# EAGLE board test_instrumentation_amplifier (EAGLE 9.0.1)
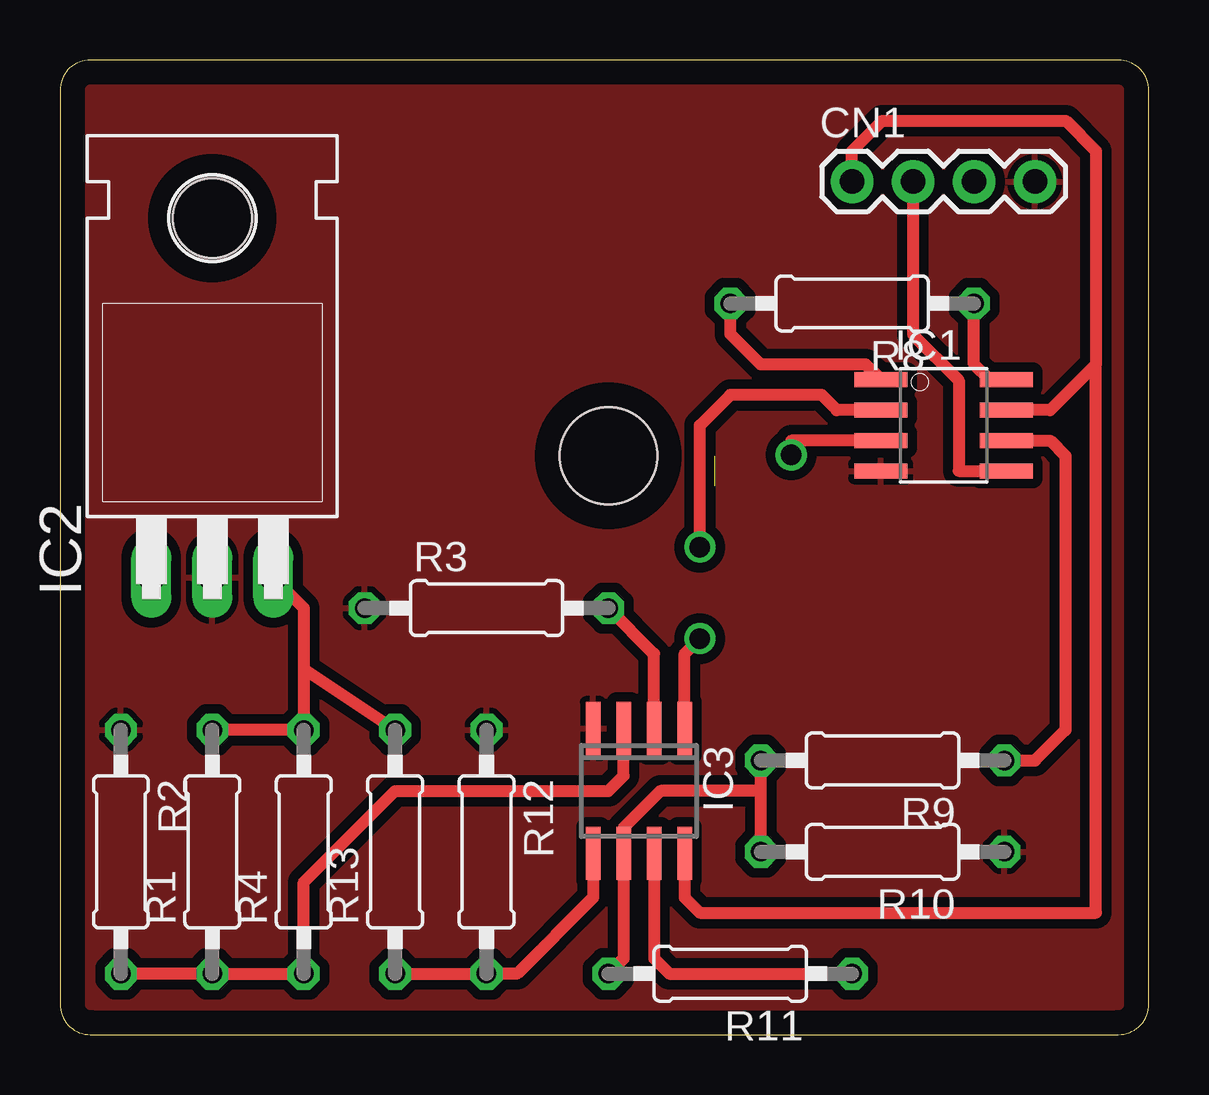
[diagram p0: board, top side]
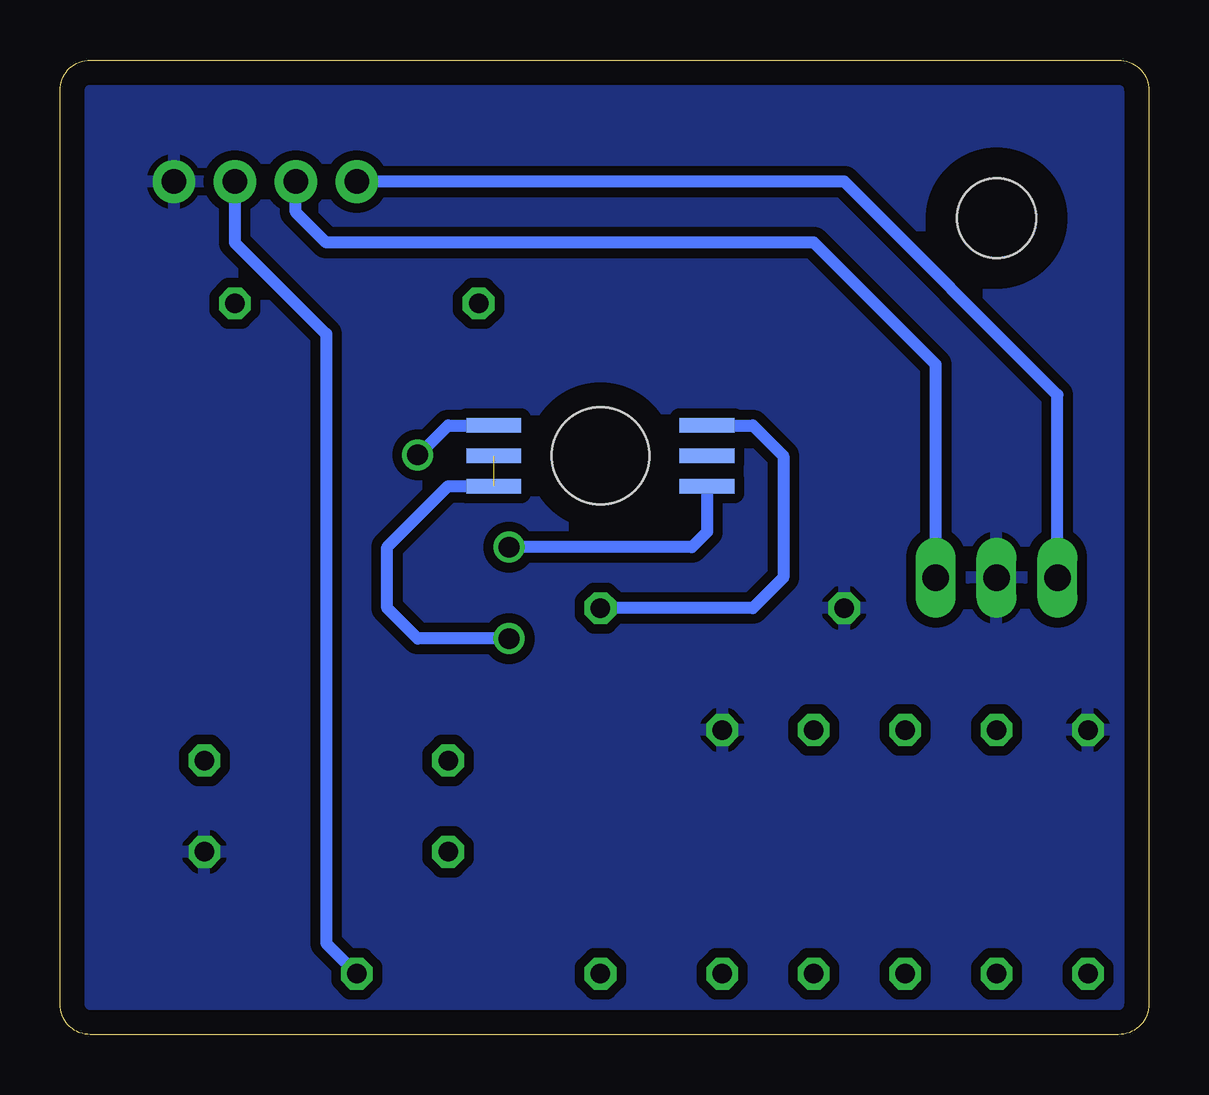
[diagram p1: board, bottom side, seen from below]

Size 45.39 x 40.63 mm. Coordinates in mm from the lower left corner, seen from the top.
Outline: 1.27,0 44.12,0 arc90 45.39,1.27 45.39,39.36 arc90 44.12,40.63 1.27,40.63 arc90 0,39.36 0,1.27 arc90 1.27,0
Copper layers (1*16): Top 0.035mm / dielectric 1.5mm / Bottom 0.035mm
Design rules "default *": minimum track width 6mil, minimum drill 0.35mm, track to track 16mil, track to pad 16mil, pad to pad 16mil, via to via 16mil, smd to smd 16mil, copper to edge 40mil, drill to drill 6mil, minimum pad ring 10mil, minimum via ring 8mil, stop-mask expansion 4mil, vias tented up to drill 0mil, thermal gap 10mil

## Footprints (pad centres in the part's own frame; a part is rotated, then mirrored left to right if it is on the bottom)
1X04-BIG = drill 1.016 pad 1.778: 1 0,0; 2 2.54,0; 3 5.08,0; 4 7.62,0
SO08 = smd 0.61 x 2.21: 1 -1.905,-2.616; 2 -0.635,-2.616; 3 0.635,-2.616; 4 1.905,-2.616; 5 1.905,2.616; 6 0.635,2.616; 7 -0.635,2.616; 8 -1.905,2.616
TO220H = drill 1.118 long: 1 -2.54,-10.16; 2 0,-10.16; 3 2.54,-10.16 | hole 3.302: 0,4.826
SO08' = smd 0.6 x 2.2: 1 -1.905,-2.6; 2 -0.635,-2.6; 3 0.635,-2.6; 4 1.905,-2.6; 5 1.905,2.6; 6 0.635,2.6; 7 -0.635,2.6; 8 -1.905,2.6
0207/10 = drill 0.813 octagon: 1 -5.08,0; 2 5.08,0
2SMPP-03 = smd 2.286 x 0.61 bottom: P$1 4.445,1.27; P$2 4.445,0; P$3 4.445,-1.27; P$4 -4.445,-1.27; P$5 -4.445,0; P$6 -4.445,1.27 | hole 4.064: 0,0

## Placement (x,y rotation side)
CN1  1X4-BIG  [1X04-BIG]  33.02,35.56 0 top
IC1  INA126U  [SO08]  36.83,25.4 270 top
IC2  7805T  [TO220H]  6.35,29.21 0 top
IC3  LM358MX  [SO08']  24.13,10.16 180 top
R1  30K  [0207/10]  6.35,7.62 90 top
R2  10K  [0207/10]  2.54,7.62 270 top
R3  20K  [0207/10]  17.78,17.78 0 top
R4  30K  [0207/10]  10.16,7.62 90 top
R8  1.78K  [0207/10]  33.02,30.48 180 top
R9  2K  [0207/10]  34.29,11.43 180 top
R10  2K  [0207/10]  34.29,7.62 180 top
R11  1K  [0207/10]  27.94,2.54 180 top
R12  10K  [0207/10]  17.78,7.62 270 top
R13  10K  [0207/10]  13.97,7.62 90 top
U$1  2SMPP-03  [2SMPP-03]  22.86,24.13 180 top

## Library data of the parts
CN1 = adafruit
IC1 = INA126; AVAILABILITY: Unavailable; DESCRIPTION: the ina126 and ina2126 are precision instrumentation amplifiers for accurate low noise differential signal acquisitio...; MF: Texas Instruments; MP: INA126; PACKAGE: TSSOP-8 Texas Instruments; PRICE: None
IC2 = linear; SPICEPREFIX: X
IC3 = linear
R1-R4 R8-R13 = eagle-ltspice; SPICEMODEL: NONE; SPICEPREFIX: R
U$1 = programmable-air-components

## Nets
GND: CN1.4 IC1.4 IC2.2 IC3.4 R2.1 R3.1 R10.1 R12.1
N$1: IC3.6 R9.2 R10.2 R11.2
N$2: IC1.8 R8.1
N$3: IC1.3 U$1.P$4
N$4: CN1.2 IC1.5 IC2.3 R1.2 R4.2 R13.2
N$5: IC1.1 R8.2
N$7: IC1.2 U$1.P$1
N$8: IC3.1 U$1.P$5 U$1.P$6
N$9: IC1.6 R9.1
N$10: IC3.3 R1.1 R2.2 R4.1
N$11: IC3.5 R12.2 R13.1
N$12: CN1.3 IC3.7 R11.1
N$13: IC3.2 R3.2 U$1.P$3
VCC: CN1.1 IC1.7 IC2.1 IC3.8

## Tracks (layer width: path | path; a pad name or v marks a point on that pad's centre or on a via)
GND
  pour Top (isolate 0.406): 0,0 0,39.37 arc-90 1.27,40.64 45.72,40.64 45.72,0
  pour Bottom (isolate 0.406): 1.27,0 44.45,0 arc90 45.72,1.27 45.72,40.64 0,40.64 0,1.27 arc90
N$1
  Top 0.508: R11.2 23.5,3.17 IC3.6 23.5,8.62 25.03,10.16 29.21,10.16 | R10.2 29.21,10.16 | 29.21,10.16 R9.2
N$2
  Top 0.508: IC1.8 38.73,27.3 38.1,27.94 R8.1
N$3  (via drill 0.86)
  Top 0.508: IC1.3 30.48,24.77 v30.48,24.17 30.48,24.13
  Bottom 0.508: v30.48,24.17 30.44,24.17 29.21,25.4 U$1.P$4
N$4
  Top 0.508: IC2.3 10.16,17.78 10.16,15.24 | 10.16,15.24 R4.2 R1.2 | R13.2 10.16,15.24 | IC1.5 37.47,23.5 37.47,27.28 35.56,29.19 CN1.2
  Bottom 0.508: IC2.3 8.89,27.94 13.97,33.02 34.29,33.02 35.56,34.29 CN1.2
N$5
  Top 0.508: IC1.1 33.58,27.94 29.21,27.94 27.94,29.21 R8.2
N$7  (via drill 0.86)
  Top 0.508: v26.67,20.32 26.67,25.4 27.94,26.67 31.75,26.67 32.38,26.04 IC1.2
  Bottom 0.508: U$1.P$1 18.41,20.95 19.05,20.32 v26.67,20.32
N$8  (via drill 0.86)  (1 unrouted)
  Top 0.508: IC3.1 26.04,15.88 v26.67,16.51
  Bottom 0.508: U$1.P$6 29.21,22.86 31.75,20.32 31.75,17.78 30.48,16.51 v26.67,16.51
N$9
  Top 0.508: R9.1 40.64,11.43 41.91,12.7 41.91,24.13 41.27,24.77 IC1.6
N$10
  Top 0.508: R2.2 R1.1 R4.1 10.16,6.35 13.97,10.16 22.86,10.16 23.5,10.79 IC3.3
N$11
  Top 0.508: R13.1 R12.2 19.05,2.54 22.23,5.71 IC3.5
N$12
  Top 0.508: IC3.7 24.77,3.17 25.4,2.54 R11.1
  Bottom 0.508: R11.1 34.29,3.81 34.29,29.21 38.1,33.02 CN1.3
N$13
  Top 0.508: IC3.2 24.77,15.88 R3.2
  Bottom 0.508: U$1.P$3 16.51,25.4 15.24,24.13 15.24,19.05 16.51,17.78 R3.2
VCC
  Top 0.508: 43.18,27.94 43.18,36.83 41.92,38.09 34.28,38.09 33.02,36.83 CN1.1 | 43.18,27.94 41.27,26.04 IC1.7 | IC3.8 26.04,5.71 26.67,5.08 43.18,5.08 43.18,27.94
  Bottom 0.508: IC2.1 3.81,26.67 12.7,35.56 CN1.1